# EAGLE board Frame2TTL (EAGLE 7.7.0)
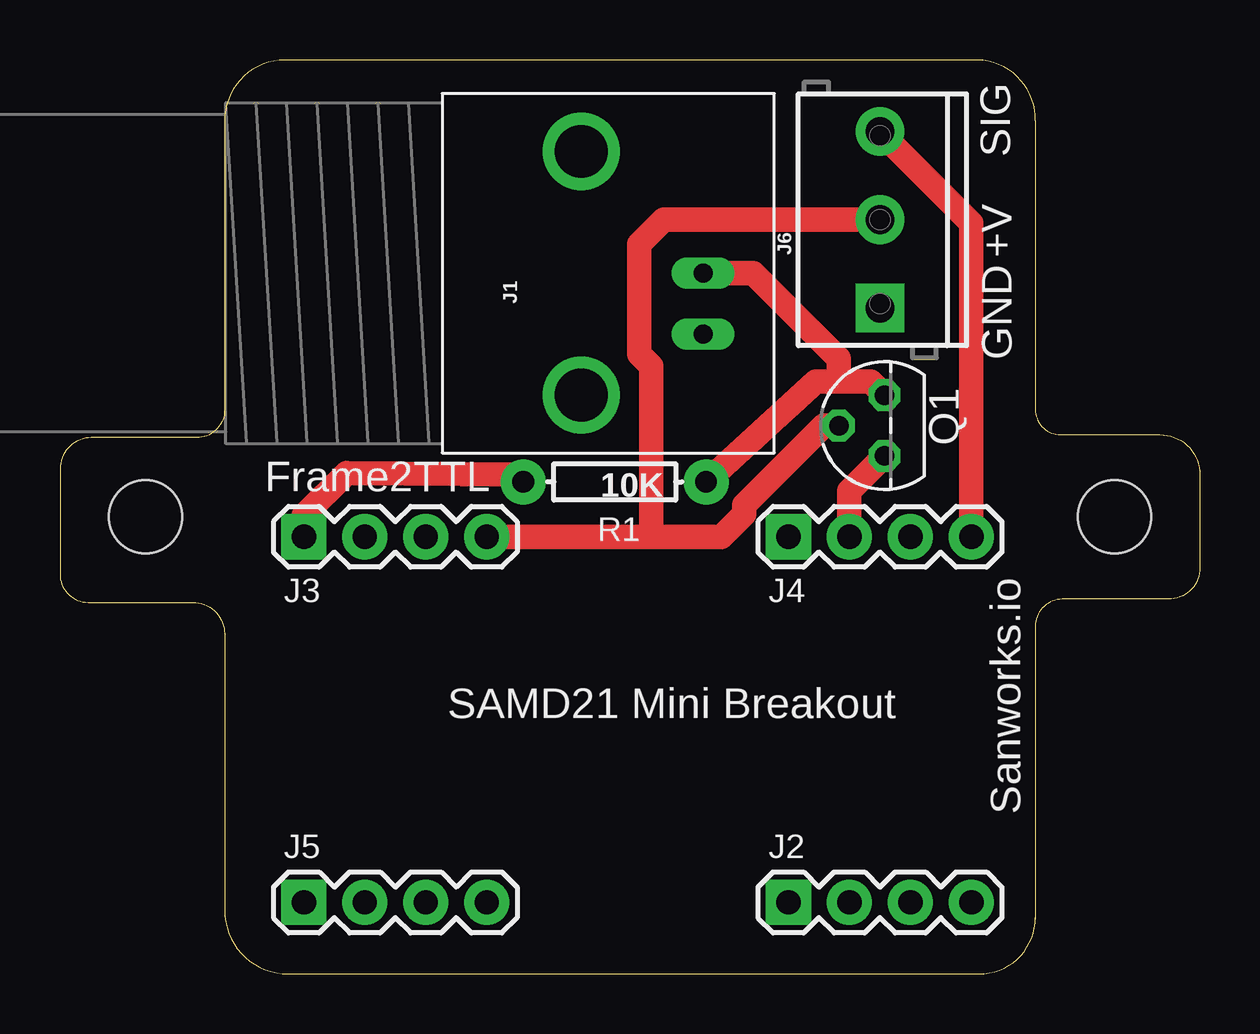
[diagram p0: board, top side]
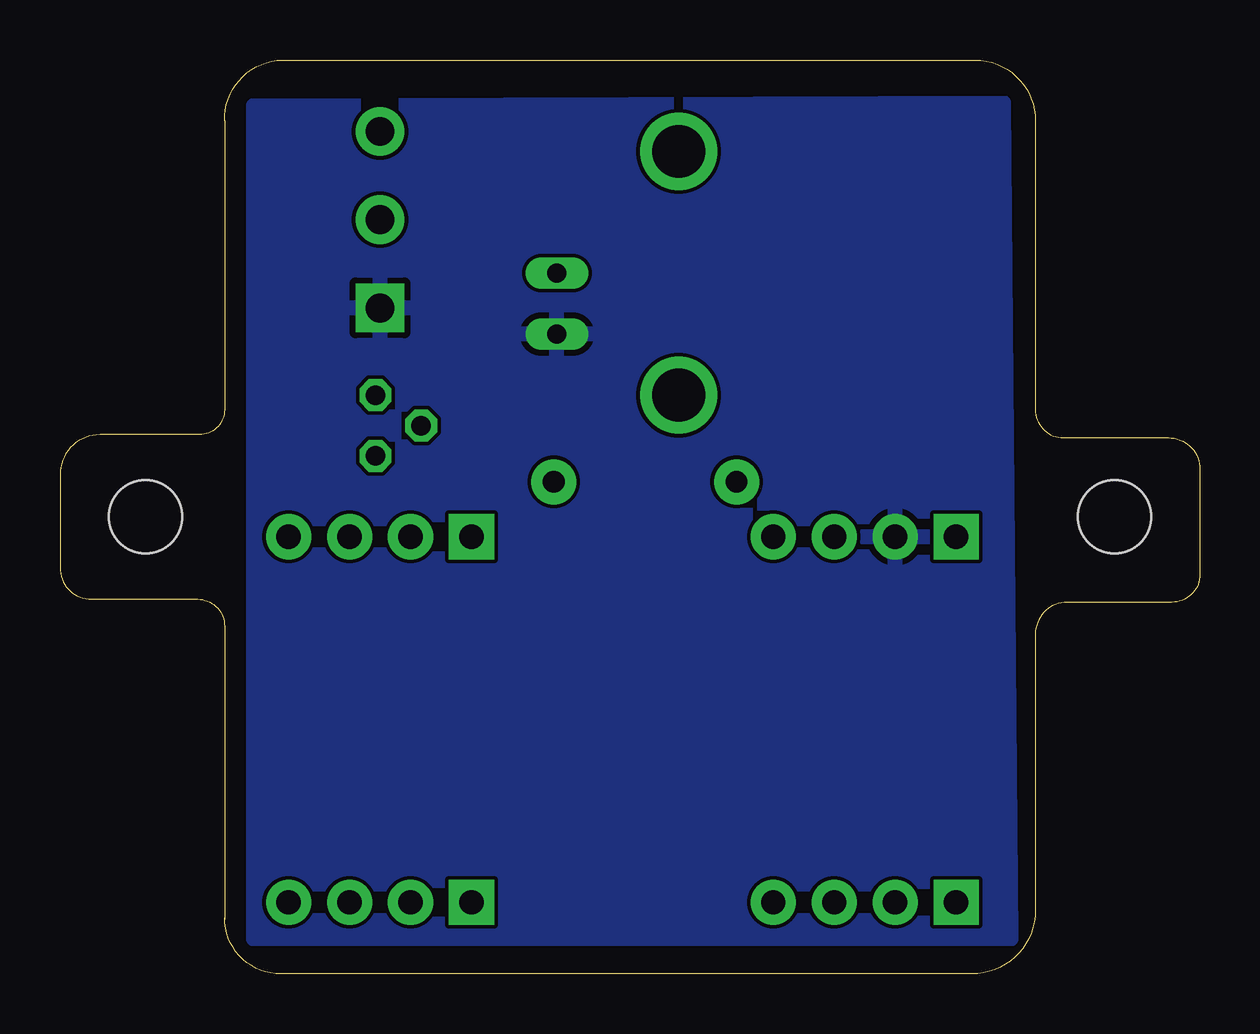
[diagram p1: board, bottom side, seen from below]

Size 47.5 x 38.1 mm. Coordinates in mm from the lower left corner, seen from the top.
Outline: 6.86,2.65 arc90 9.51,0 38.3,0 arc90 40.64,2.34
Outline: 6.86,2.6 6.86,14.17 arc90 5.53,15.49 1.17,15.49 arc-90 0,16.66 0,21.04 arc-90 1.31,22.35 5.69,22.35 arc90 6.86,23.52 6.86,35.56 arc-90 9.36,38.1 38.23,38.1 arc-90 40.64,35.56 40.64,23.53 arc90 41.69,22.48 45.83,22.48 arc-90 47.5,20.81 47.5,16.93 arc-90 46.19,15.62 41.76,15.62 arc90 40.64,14.5 40.64,2.29
Copper layers (1*16): Top 0.035mm / dielectric 1.5mm / Bottom 0.035mm
Design rules "SeeedStudio_2layer_DRU_no_angle_20140221": minimum track width 6mil, minimum drill 12mil, track to track 6mil, track to pad 6mil, pad to pad 6mil, via to via 6mil, smd to smd 0mil, copper to edge 10mil, drill to drill 10mil, minimum pad ring 10mil, minimum via ring 6mil, stop-mask expansion 2mil, vias tented up to drill 100mil, thermal gap 10mil

## Footprints (pad centres in the part's own frame; a part is rotated, then mirrored left to right if it is on the bottom)
STAND-OFF-TIGHT = hole 3.048: 0,0
BNC = drill 2.2: 3 -5.08,5.08; 4 5.08,5.08 | drill 0.8 long: GND -2.54,0; S 0,0
1X04 = drill 1.016 pad 1.88 square: 1 0,0 | drill 1.016 pad 1.88: 2 2.54,0; 3 5.08,0; 4 7.62,0
SCREWTERMINAL-3.5MM-3_LOCK.007S = drill 1.2 pad 2.032 square: 1 -0.178,0 | drill 1.2 pad 2.032: 2 3.5,0; 3 7.178,0
TO92F = drill 0.813 octagon: D 1.27,0; G 0,1.905; S -1.27,0
AXIAL-0.3 = drill 0.9 pad 1.88: P$1 -3.81,0; P$2 3.81,0

## Placement (x,y rotation side)
H1  STAND-OFFTIGHT  [STAND-OFF-TIGHT]  3.56,19.05 0 top
H2  STAND-OFFTIGHT  [STAND-OFF-TIGHT]  43.94,19.05 0 top
J1  BNCPTH  [BNC]  26.8,29.21 90 top
J2  [1X04]  30.35,2.98 0 top
J3  [1X04]  10.16,18.22 0 top
J4  [1X04]  30.35,18.22 0 top
J5  [1X04]  10.16,2.98 0 top
J6  [SCREWTERMINAL-3.5MM-3_LOCK.007S]  34.16,27.94 90 top
Q1  2N3819  [TO92F]  34.35,22.86 90 top
R1  10K  [AXIAL-0.3]  23.11,20.51 180 top

## Library data of the parts
H1 H2 = SparkFun-Hardware
J1 = SparkFun-Connectors; PROD_ID: LPA-12729; SF_ID: PRT-10550
J2-J5 = SparkFun-Connectors; PROD_ID: CONN-09696
J6 = SparkFun-Connectors; PROD_ID: CONN-08288; SF_ID: PRT-08235
Q1 = transistor-small-signal
R1 = SparkFun

## Nets
5V: J3.1 R1.P$2
GND: J1.GND J3.2 J6.1
N$1: J4.4 J6.3
N$2: J4.2 Q1.S
N$3: J1.S Q1.D R1.P$1
VCC: J3.4 J6.2 Q1.G

## Tracks (layer width: path | path; a pad name or v marks a point on that pad's centre or on a via)
5V
  Top 1.016: J3.1 10.16,19.11 11.94,20.89 19.05,20.83 R1.P$2
GND
  pour Bottom: 7.87,1.46 39.43,1.46 39.43,36.2 8.19,36.32
N$1
  Top 1.016: J4.4 37.97,31.31 J6.3
N$2
  Top 1.016: J4.2 32.89,20.13 Q1.S
N$3
  Top 1.016: R1.P$1 31.5,24.7 32.45,24.7 | 32.45,24.7 33.78,24.7 Q1.D | J1.S 28.89,29.21 32.45,25.65 32.45,24.7
VCC
  Top 1.016: J3.4 24.45,18.22 | 24.45,18.22 27.56,18.22 28.51,19.18 28.51,19.56 31.81,22.86 Q1.G | J6.2 25.15,31.44 24.13,30.42 24.13,25.84 24.64,25.34 24.64,18.41 24.45,18.22

## Text on the board
tPlace: SIG | +V | GND | Frame2TTL | Sanworks.io | SAMD21 Mini Breakout